# EAGLE board button (EAGLE 6.5.0)
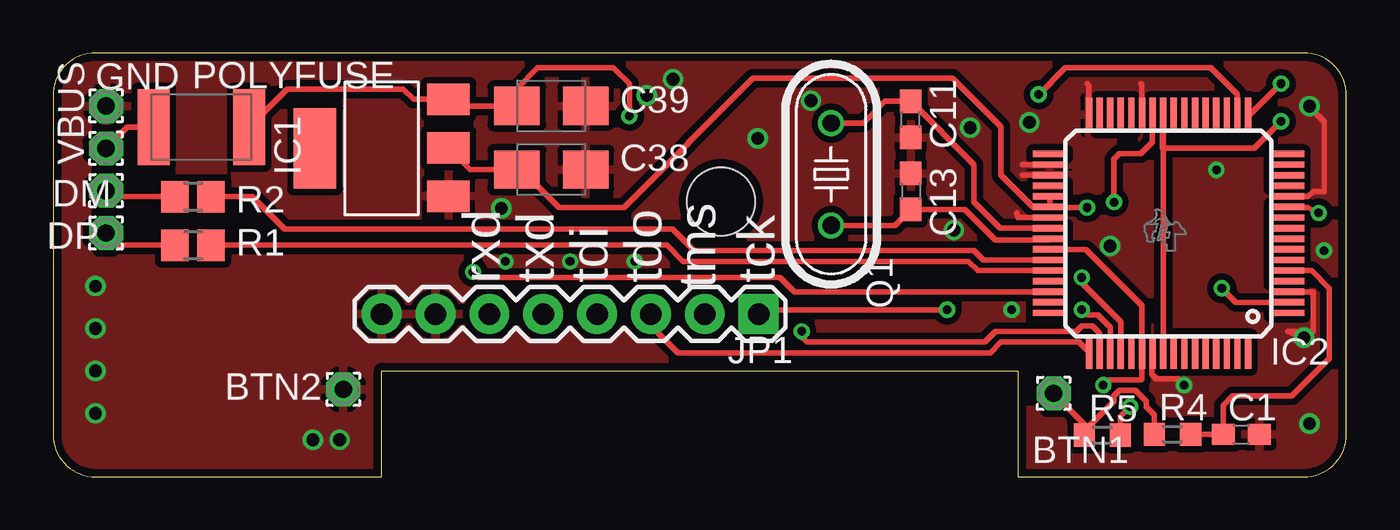
[diagram p0: board, top side]
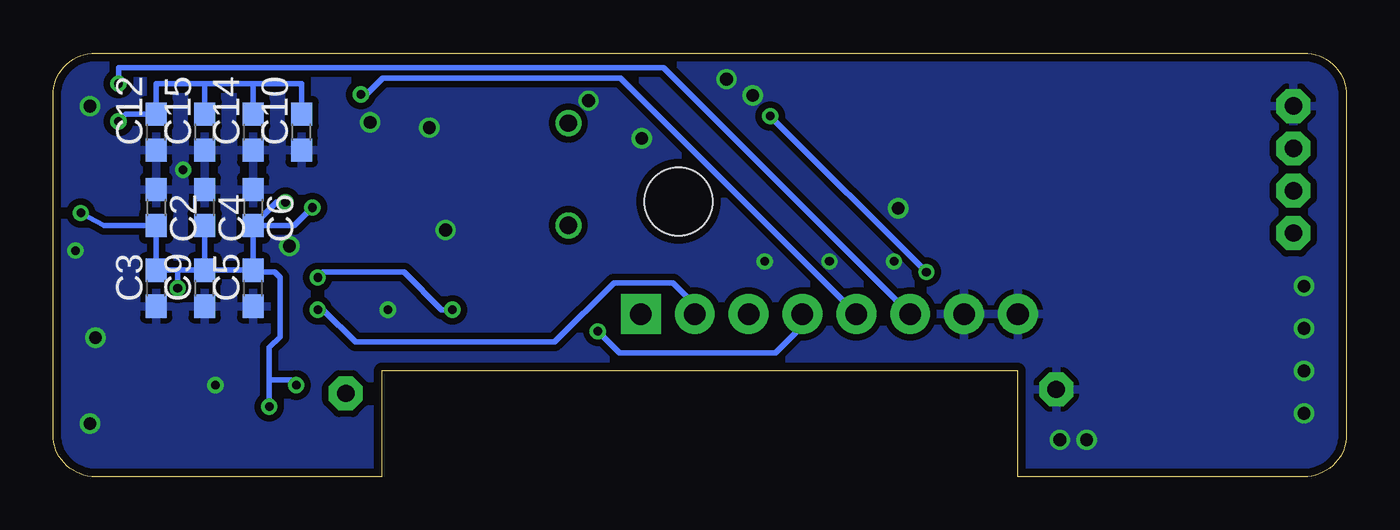
[diagram p1: board, bottom side, seen from below]

Size 61 x 20 mm. Coordinates in mm from the lower left corner, seen from the top.
Outline: 0,18 0,2 arc90 2,0 15.5,0 15.5,5 45.5,5 45.5,0 59,0 arc90 61,2 61,18 arc90 59,20 2,20 arc90 0,18
Copper layers (1*16): Top 0.0356mm / dielectric 1.5011mm / Bottom 0.0356mm
Design rules "LaenPCBOrder": minimum track width 6mil, minimum drill 13mil, track to track 6mil, track to pad 6mil, pad to pad 6mil, via to via 6mil, smd to smd 6mil, copper to edge 15mil, drill to drill 6mil, minimum pad ring 7mil, minimum via ring 7mil, stop-mask expansion 4mil, vias tented up to drill 0mil, thermal gap 10mil
Holes 3.2 mm at 31.5,13

## Footprints (pad centres in the part's own frame; a part is rotated, then mirrored left to right if it is on the bottom)
1,6/0,8 = drill 0.813 pad 1.6 octagon: 1 0,0
C0603 = smd 1.1 x 1: 1 -0.85,0; 2 0.85,0
B/3528-21W = smd 2.15 x 1.8: + 1.625,0; - -1.625,0
SOT223 = smd 1.499 x 2.007: 1 -2.261,-3.15; 2 0.025,-3.15; 3 2.311,-3.15 | smd 3.81 x 2.007: 4 0,3.15
PM_S-PQFP-G64 = smd 1.6 x 0.3: 1 -5.6,3.75; 2 -5.6,3.25; 3 -5.6,2.75; 4 -5.6,2.25; 5 -5.6,1.75; 6 -5.6,1.25; 7 -5.6,0.75; 8 -5.6,0.25; 9 -5.6,-0.25; 10 -5.6,-0.75; 11 -5.6,-1.25; 12 -5.6,-1.75; 13 -5.6,-2.25; 14 -5.6,-2.75; 15 -5.6,-3.25; 16 -5.6,-3.75; 33 5.6,-3.75; 34 5.6,-3.25; 35 5.6,-2.75; 36 5.6,-2.25; 37 5.6,-1.75; 38 5.6,-1.25; 39 5.6,-0.75; 40 5.6,-0.25; 41 5.6,0.25; 42 5.6,0.75; 43 5.6,1.25; 44 5.6,1.75; 45 5.6,2.25; 46 5.6,2.75; 47 5.6,3.25; 48 5.6,3.75 | smd 0.3 x 1.6: 17 -3.75,-5.6; 18 -3.25,-5.6; 19 -2.75,-5.6; 20 -2.25,-5.6; 21 -1.75,-5.6; 22 -1.25,-5.6; 23 -0.75,-5.6; 24 -0.25,-5.6; 25 0.25,-5.6; 26 0.75,-5.6; 27 1.25,-5.6; 28 1.75,-5.6; 29 2.25,-5.6; 30 2.75,-5.6; 31 3.25,-5.6; 32 3.75,-5.6; 49 3.75,5.6; 50 3.25,5.6; 51 2.75,5.6; 52 2.25,5.6; 53 1.75,5.6; 54 1.25,5.6; 55 0.75,5.6; 56 0.25,5.6; 57 -0.25,5.6; 58 -0.75,5.6; 59 -1.25,5.6; 60 -1.75,5.6; 61 -2.25,5.6; 62 -2.75,5.6; 63 -3.25,5.6; 64 -3.75,5.6
1X08 = drill 1.016 pad 1.88 square: 1 0,0 | drill 1.016 pad 1.88: 2 2.54,0; 3 5.08,0; 4 7.62,0; 5 10.16,0; 6 12.7,0; 7 15.24,0; 8 17.78,0
CT/CN1812 = smd 1.5 x 3.6: 1 -2.25,0; 2 2.25,0
HC49/S = drill 0.813: 1 -2.413,0; 2 2.413,0
R0805 = smd 1.3 x 1.5: 1 -0.85,0; 2 0.85,0
R0603 = smd 1 x 1.1: 1 -0.85,0; 2 0.85,0

## Placement (x,y rotation side)
BTN1  [1,6/0,8]  47.19,3.94 0 top
BTN2  [1,6/0,8]  13.69,4.13 0 top
C1  100nF  [C0603]  56.04,2.01 0 top
C2  1µF  [C0603]  56.13,12.71 270 bottom
C3  10nF  [C0603]  56.13,8.9 90 bottom
C4  100nF  [C0603]  53.85,12.71 270 bottom
C5  10nF  [C0603]  51.56,8.9 90 bottom
C6  100nF  [C0603]  51.56,12.71 270 bottom
C9  10nF  [C0603]  53.85,8.9 90 bottom
C10  2.2µF  [C0603]  49.28,16.26 90 bottom
C11  10pF  [C0603]  40.45,16.87 90 top
C12  1µF  [C0603]  56.13,16.26 90 bottom
C13  10pF  [C0603]  40.45,13.47 270 top
C14  100nF  [C0603]  51.56,16.26 90 bottom
C15  100nF  [C0603]  53.85,16.26 90 bottom
C38  22µF  [B/3528-21W]  23.5,14.5 180 top
C39  10µF  [B/3528-21W]  23.5,17.5 180 top
DM  [1,6/0,8]  2.5,13.5 0 top
DP  [1,6/0,8]  2.5,11.5 0 top
GND  [1,6/0,8]  2.5,17.5 0 top
IC1  REG1117  [SOT223]  15.5,15.5 90 top
IC2  TM4C123[7,G]XXPM  [PM_S-PQFP-G64]  52.6,11.48 180 top
JP1  [1X08]  33.28,7.68 180 top
POLYFUSE  VARISTORCN1812  [CT/CN1812]  7,16.5 180 top
Q1  RTC  [HC49/S]  36.7,14.28 90 top
R1  22  [R0805]  6.6,10.93 0 top
R2  22  [R0805]  6.6,13.22 0 top
R4  220  [R0603]  52.79,2.01 0 top
R5  220  [R0603]  49.49,1.97 0 top
VBUS  5V  [1,6/0,8]  2.5,15.5 0 top

## Library data of the parts
BTN1 BTN2 DM DP GND VBUS = wirepad
C1-C6 C9-C15 C38 C39 R4 R5 = rcl
IC1 = burr-brown; MPN: REG1117; OC_FARNELL: 1097566; OC_NEWARK: 14P6981
IC2 = ti-tiva
JP1 = SparkFun-Connectors
POLYFUSE = varistor
Q1 = crystal; OC_FARNELL: 1667008; OC_NEWARK: unknown
R1 R2 = resistor

## Nets
+3V3: C2.2 C3.2 C4.2 C5.2 C6.2 C9.2 C38.+ IC1.2 IC2.2 IC2.11 IC2.26 IC2.37 IC2.38 IC2.42 IC2.54 R5.2
+5V: C39.+ IC1.3 IC2.46 POLYFUSE.1
BTN: C1.1 IC2.5 R4.2
D+: IC2.44 R1.2
D-: IC2.43 R2.2
GND: BTN2.1 C1.2 C2.1 C3.1 C4.1 C5.1 C6.1 C9.1 C10.1 C11.1 C12.1 C13.1 C14.1 C15.1 C38.- C39.- GND.1 IC1.1 IC2.3 IC2.12 IC2.27 IC2.32 IC2.34 IC2.35 IC2.39 IC2.55 JP1.7 JP1.8
N$2: BTN1.1 R4.1 R5.1
N$6: DP.1 R1.1
N$7: DM.1 R2.1
N$10: POLYFUSE.2 VBUS.1
OSC0: C11.2 IC2.40 Q1.2
OSC1: C13.2 IC2.41 Q1.1
RXD: IC2.17 JP1.6
TCK: IC2.52 JP1.1
TDI: IC2.50 JP1.4
TDO: IC2.49 JP1.3
TMS: IC2.51 JP1.2
TXD: IC2.18 JP1.5
VDDC: C10.2 C12.2 C14.2 C15.2 IC2.25 IC2.56

## Tracks (layer width: path | path; a pad name or v marks a point on that pad's centre or on a via)
+3V3  (via drill 0.41)
  Top 0.254: IC1.2 19.68,14.5 C38.+ 21.84,14.53 21.84,14.74 23.88,12.71 26.92,12.71 33.02,18.8 42.42,18.8 44.7,16.52 44.7,14.23 46.2,12.73 IC2.38 | v48.77,12.71 47.03,12.71 IC2.38 | IC2.38 IC2.37 | R5.2 50.34,2.85 v50.8,3.31 | v50.04,12.96 50.04,14.99 50.29,15.25 51.31,15.25 51.85,15.79 IC2.26 | IC2.54 51.35,8.09 48.71,10.73 IC2.42 | 51.35,5.04 IC2.54 | IC2.11 58.23,12.71 59.18,12.71 v59.69,12.45 | IC2.2 55.78,8.23 v55.12,8.9 | IC2.54 51.35,4.63 51.31,4.58 49.78,4.58 v49.53,4.33
  Bottom 0.254: C5.2 C9.2 | C9.2 55.12,9.75 | 55.12,9.75 C3.2 C2.2 58.59,11.86 v59.69,12.45 | C9.2 C4.2 | C6.2 49.62,11.86 v48.77,12.71 | v50.8,3.31 50.8,4.58 | 50.8,4.58 50.8,6.1 50.29,6.61 50.29,9.41 50.55,9.66 51.47,9.66 C5.2 | C5.2 C6.2 | C6.2 50.46,12.96 v50.04,12.96 | v55.12,8.9 55.12,9.75 | v49.53,4.33 49.78,4.58 50.8,4.58
+5V  (via drill 0.41)
  Top 0.254: POLYFUSE.1 11.05,18.3 16.51,18.3 17,17.81 IC1.3 18.96,17.5 C39.+ 21.88,18.33 22.86,19.31 26.42,19.31 27.18,18.55 v27.18,17.03 | IC2.46 34.96,8.73 34.29,9.41 20.07,9.41 v19.81,9.66
  Bottom 0.254: v19.81,9.66 v27.18,17.03
BTN
  Top 0.254: R4.2 C1.1 55.19,3.38 55.63,3.82 58.42,3.82 60.2,5.6 60.2,8.9 59.36,9.73 IC2.5
D+
  Top 0.254: R1.2 28.96,10.93 29.72,10.17 43.18,10.17 43.61,9.73 IC2.44
D-
  Top 0.254: R2.2 9.4,13.22 10.92,11.69 29.21,11.69 30.23,10.68 43.43,10.68 43.88,10.23 IC2.43
GND  (via drill 0.41, 0.6)
  Top 0.254: IC2.34 45.73,14.73 45.72,14.74 | IC2.35 45.72,14.23 | IC2.39 45.5,12.23 45.47,12.45 | 59.44,8.64 59.35,8.73 IC2.3 59.44,8.73 59.44,6.87 58.24,6.87 v59,6.57 | IC2.27 51.35,18.5 51.31,18.55 | IC2.32 48.85,18.46 48.77,18.55 | v53.34,4.33 53.09,4.62 52.03,4.62 51.82,4.83 51.82,5.85 IC2.55 | IC2.12 58.22,13.22 59.18,13.22 59.44,13.47 59.94,13.47 59.94,16.77 59.25,17.46 v59.25,17.49
  other vias: 28,18 29.24,18.76 33.24,15.97 35.75,17.75 2,9 2,7 2,5 2,3 59.25,2.51 43.25,16.48 46.05,16.73 49.86,10.89 42.49,11.65 21.14,12.67 13.52,1.74 12.25,1.74 45.21,7.88 27.43,10.17 24.38,10.17 21.34,10.17 54.86,14.49 59.94,10.68
  pour Bottom (isolate 0.305): -1,21 -2,21 -2,-1.5 63,-1.5 63,21
  pour Top (isolate 0.305): 0,21.5 -1.5,21.5 -1.5,-1.5 62.5,-1.5 62.5,21.5
N$2
  Top 0.254: BTN1.1 48.64,2.48 R5.1 | R5.1 48.64,2.42 | R4.1 51.94,2.93 51.56,3.31 51.56,3.56 51.05,4.07 50.29,4.07 50.04,3.82 50.04,3.56 48.64,2.17 R5.1
N$6
  Top 0.254: DP.1 3.07,10.93 R1.1
N$7
  Top 0.254: DM.1 2.78,13.22 R2.1
N$10
  Top 0.254: VBUS.1 3.5,16.5 POLYFUSE.2
OSC0
  Top 0.254: IC2.40 44.66,11.73 43.43,12.96 43.43,14.73 C11.2 39.24,17.72 38.22,16.69 Q1.2
OSC1
  Top 0.254: IC2.41 46.95,11.18 44.45,11.18 43.02,12.62 C13.2 39.7,11.87 Q1.1
RXD  (via drill 0.41)
  Top 0.254: v57.91,18.55 56.45,17.08 IC2.17
  Bottom 0.254: JP1.6 32.21,19.31 57.91,19.31 v57.91,18.55
TCK  (via drill 0.41)
  Top 0.254: IC2.52 50.35,7.31 48.51,9.15 v48.51,9.41 | JP1.1 33.48,7.88 v42.16,7.88
  Bottom 0.254: v48.51,9.41 48.26,9.66 44.45,9.66 42.67,7.88 v42.16,7.88
TDI  (via drill 0.41)
  Top 0.254: IC2.50 49.35,6.79 49.02,7.12 48.51,7.12 48.26,6.87 44.45,6.87 43.94,6.36 35.56,6.36 35.31,6.61 v35.31,6.87
  Bottom 0.254: v35.31,6.87 34.29,5.85 26.92,5.85 25.66,7.12 JP1.4
TDO
  Top 0.254: IC2.49 48.38,6.36 44.7,6.36 44.2,5.85 29.46,5.85 28.2,7.12 JP1.3
TMS  (via drill 0.41)
  Top 0.254: IC2.51 49.85,7.05 49.28,7.63 48.77,7.63 v48.51,7.88
  Bottom 0.254: JP1.2 30.74,8.14 31.75,9.15 34.54,9.15 37.34,6.36 46.74,6.36 48.26,7.88 v48.51,7.88
TXD  (via drill 0.41)
  Top 0.254: v46.48,18.04 47.75,19.31 54.61,19.31 55.85,18.07 IC2.18
  Bottom 0.254: JP1.5 34.24,18.8 45.47,18.8 46.23,18.04 v46.48,18.04
VDDC  (via drill 0.41)
  Top 0.254: IC2.56 IC2.25 52.32,17.05 52.32,15.5 56.64,15.5 v57.91,16.77
  Bottom 0.254: C10.2 49.28,18.55 51.56,18.55 | C14.2 51.56,18.55 | 51.56,18.55 53.85,18.55 | C15.2 53.85,18.55 | 53.85,18.55 56.13,18.55 C12.2 57.57,17.11 v57.91,16.77

## Text on the board
tNames: rxd | txd | tdi | tdo | tck | tms